# EAGLE board Ground Plate (EAGLE 9.6.2)
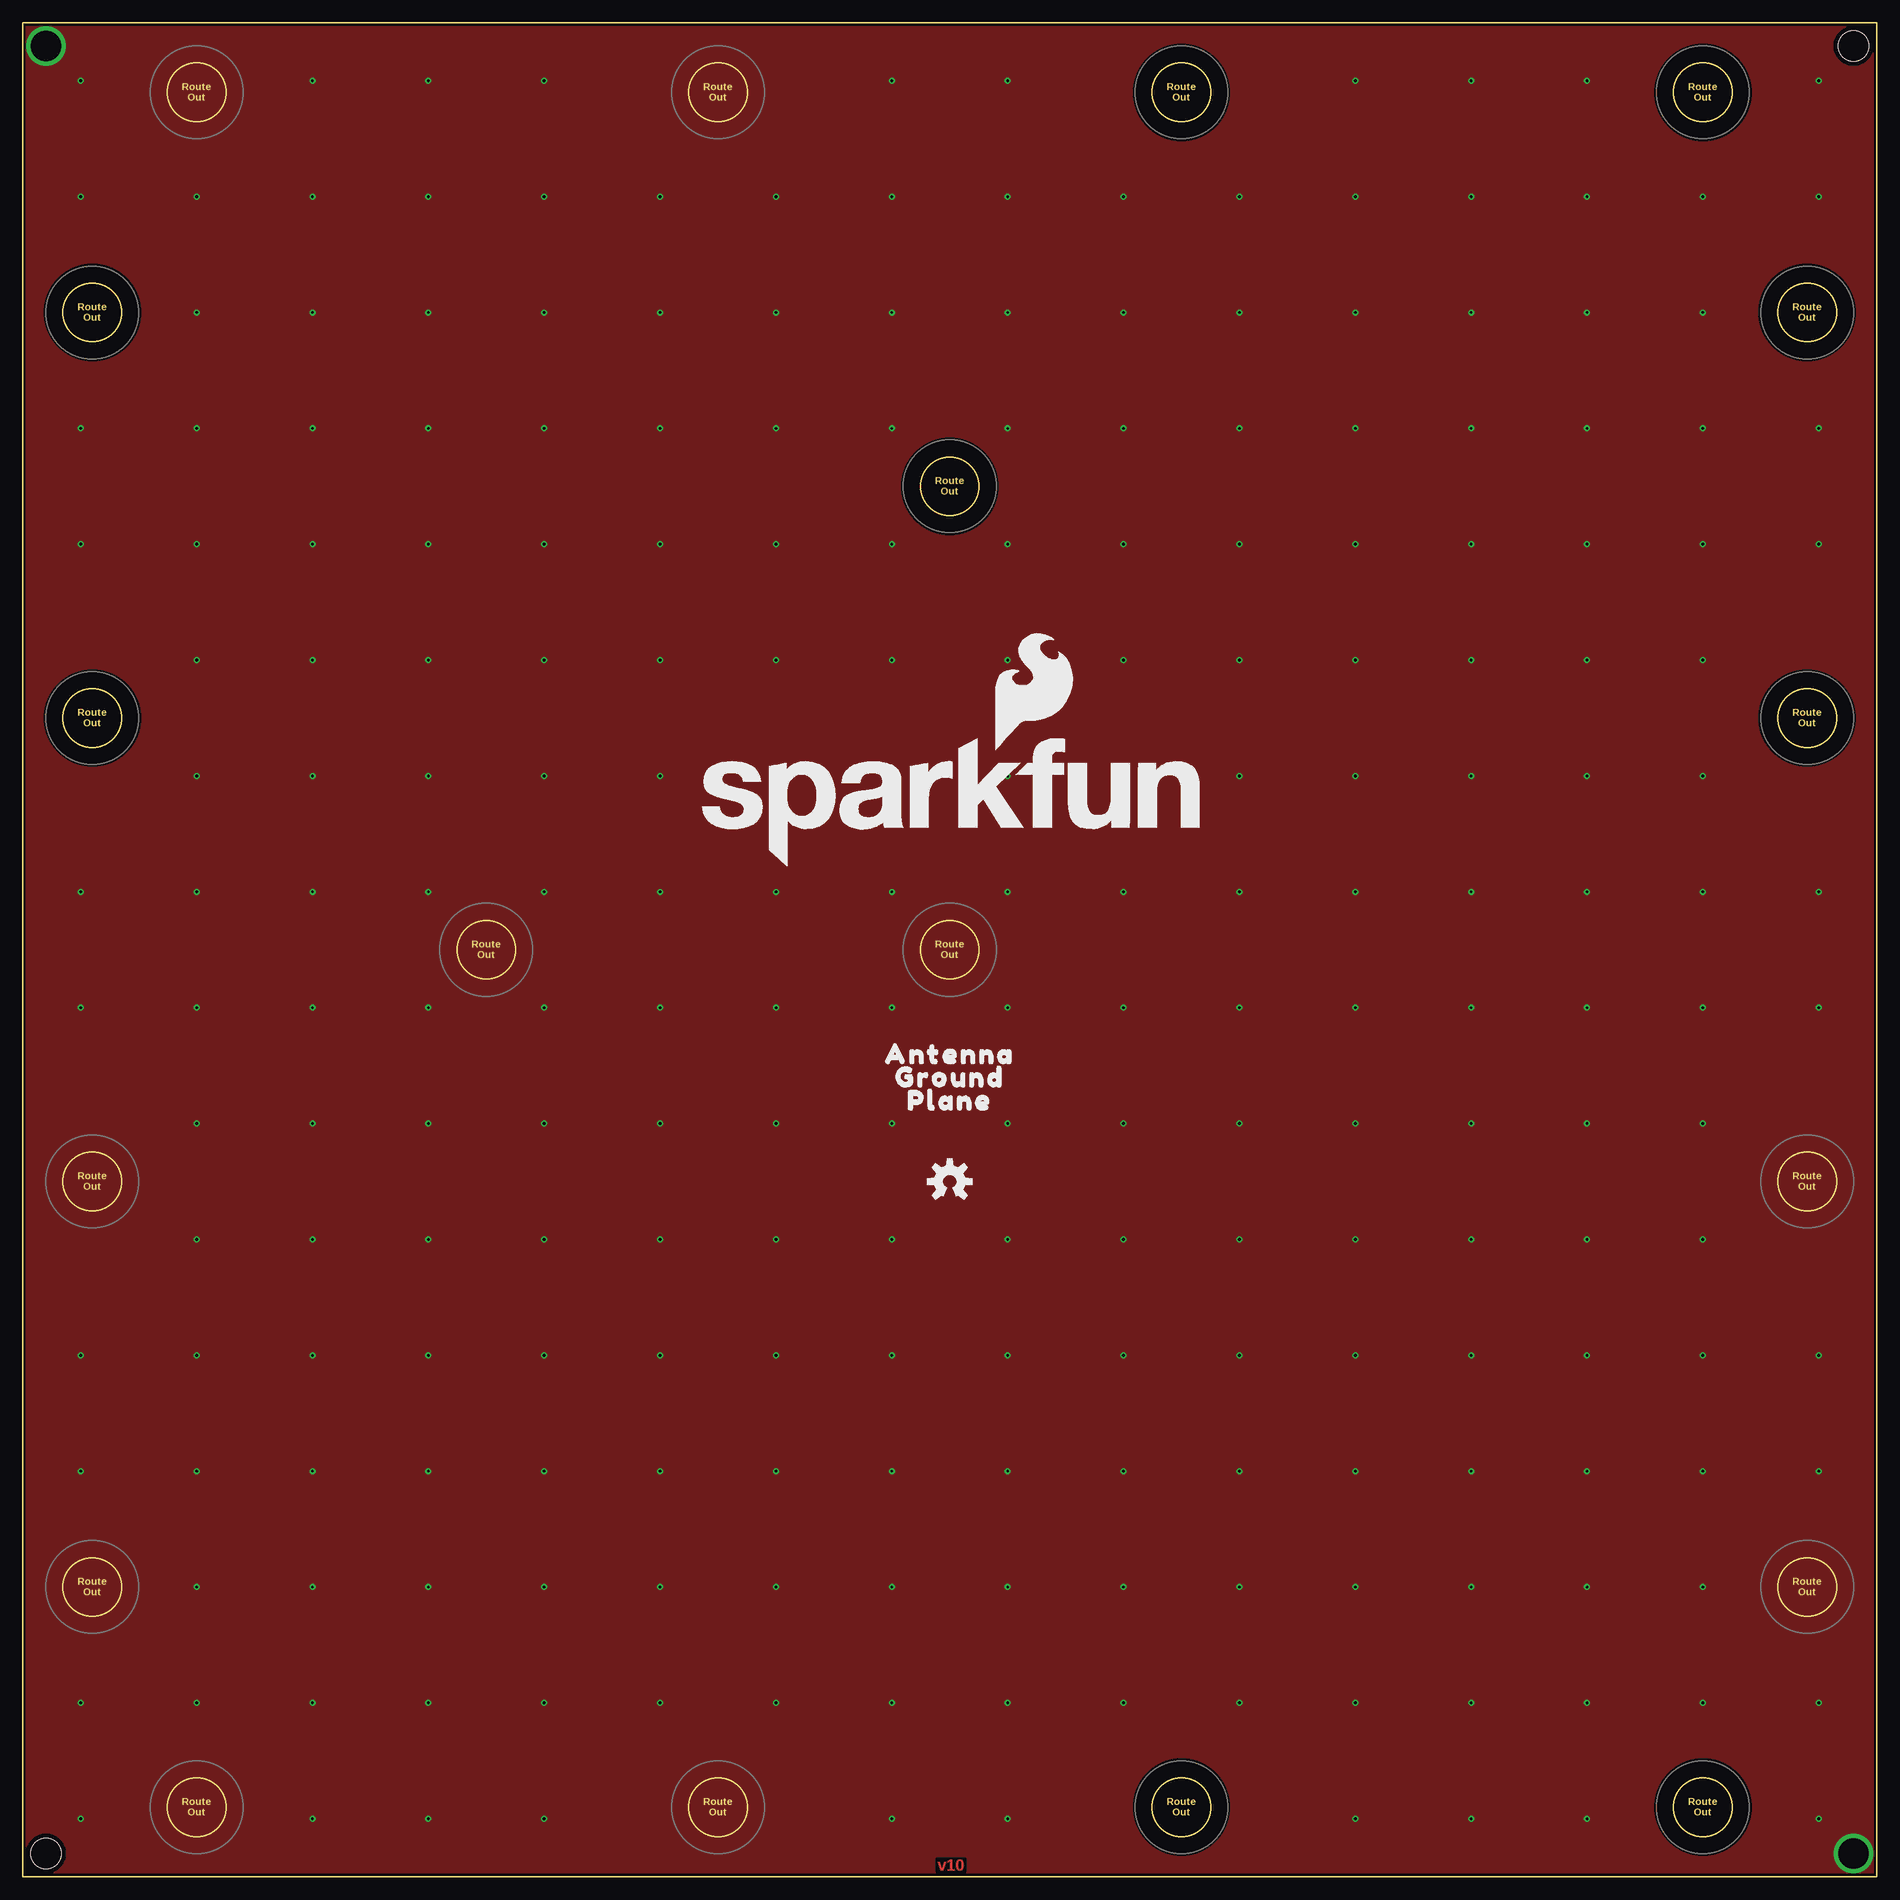
[diagram p0: board, top side]
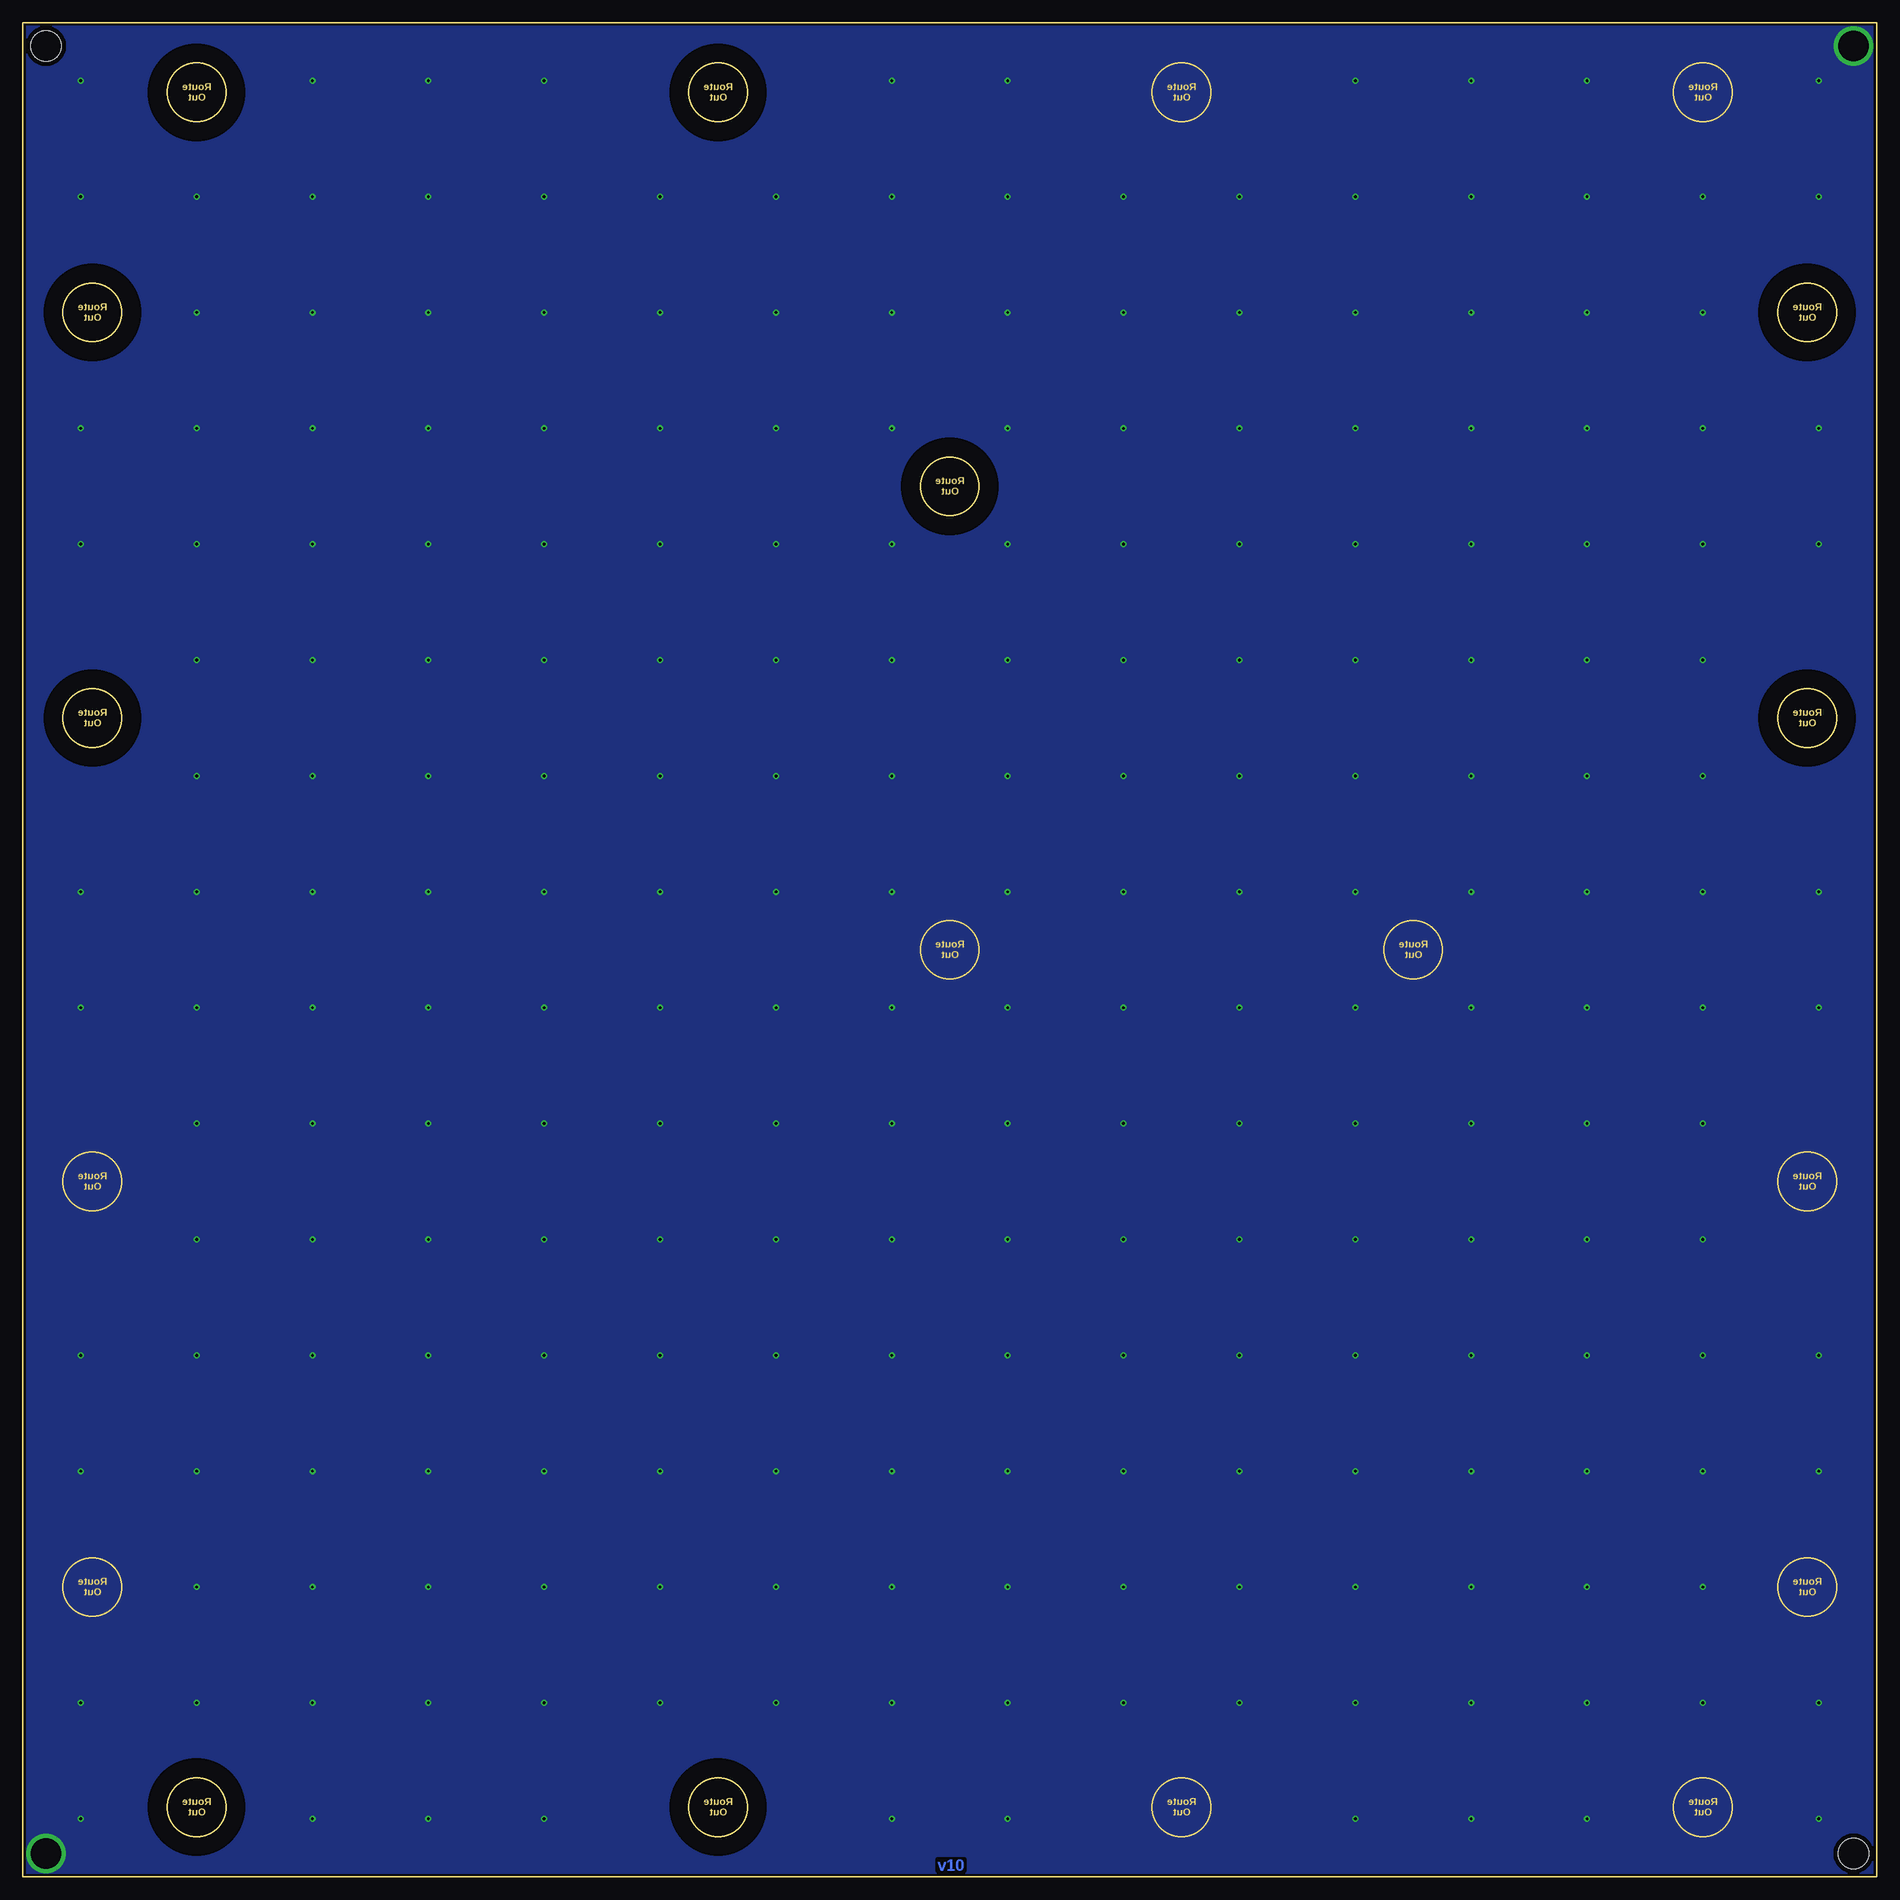
[diagram p1: board, bottom side, seen from below]

Size 203.2 x 203.2 mm. Coordinates in mm from the lower left corner, seen from the top.
Outline: 203.2,0 0,0 0,203.2 203.2,203.2 203.2,0
Copper layers (1*16): Top 0.035mm / dielectric 1.5mm / Bottom 0.035mm
Design rules "SparkFun-2-Layer-General-JLCPCB": minimum track width 7mil, minimum drill 0.3mm, track to track 7mil, track to pad 7mil, pad to pad 7mil, via to via 7mil, smd to smd 7mil, copper to edge 7mil, drill to drill 7mil, minimum pad ring 7mil, minimum via ring 7mil, stop-mask expansion 3mil, vias tented up to drill 25mil, thermal gap 10mil
Net classes: 1 power: width 0.178 mm; 2 3.3V: width 0.508 mm

## Footprints (pad centres in the part's own frame; a part is rotated, then mirrored left to right if it is on the bottom)
STAND-OFF = hole 3.302: 0,0

## Placement (x,y rotation side)
FRAME1  FRAME-LETTER  [CREATIVE_COMMONS]  248.92,8.89 0 top  (outside the outline)
JP31  STAND-OFF  [STAND-OFF]  2.54,2.54 90 top
JP91  STAND-OFF  [STAND-OFF]  200.66,200.66 90 top
LOGO1  OSHW-LOGOM  [OSHW-LOGO-M]  101.6,76.2 0 top
LOGO2  SFE_LOGO_NAME_FLAME.5_INCH  [SFE_LOGO_NAME_FLAME_.5]  73.66,110.49 0 top
U$1  [ANTENNA0]  101.6,90.17 0 top
U$2  SPECIAL_INSTRUCTIONS-ORDERING  [ORDERING_INSTRUCTIONS]  232.41,69.85 0 top  (outside the outline)
U$3  [GROUND1]  101.6,87.63 0 top
U$4  [PLANE2]  101.6,85.09 0 top
U$5  SMA-ANTENNA-THREADED-NOT-KEYED_WITH-STOP  [SMA-THREADED_WITH-STOP]  19.05,7.62 0 top
U$6  SMA-ANTENNA-THREADED-NOT-KEYED_WITH-STOP  [SMA-THREADED_WITH-STOP]  19.05,195.58 0 top
U$7  SMA-ANTENNA-THREADED-NOT-KEYED_WITH-STOP  [SMA-THREADED_WITH-STOP]  76.2,195.58 0 top
U$8  SMA-ANTENNA-THREADED-NOT-KEYED_WITH-STOP  [SMA-THREADED_WITH-STOP]  7.62,76.2 0 top
U$9  SMA-ANTENNA-THREADED-NOT-KEYED_WITH-STOP  [SMA-THREADED_WITH-STOP]  195.58,31.75 0 top
U$10  SMA-ANTENNA-THREADED-NOT-KEYED_WITH-STOP  [SMA-THREADED_WITH-STOP]  195.58,76.2 0 top
U$11  SMA-ANTENNA-THREADED-NOT-KEYED_WITH-STOP  [SMA-THREADED_WITH-STOP]  101.6,101.6 0 top
U$12  SMA-ANTENNA-THREADED-NOT-KEYED_WITH-STOP  [SMA-THREADED_WITH-STOP]  7.62,31.75 0 top
U$13  SMA-ANTENNA-THREADED-NOT-KEYED_NO-COPPER  [SMA-THREADED_NO-COPPER]  7.62,127 0 top
U$14  SMA-ANTENNA-THREADED-NOT-KEYED_NO-COPPER  [SMA-THREADED_NO-COPPER]  7.62,171.45 0 top
U$15  SMA-ANTENNA-THREADED-NOT-KEYED_NO-COPPER  [SMA-THREADED_NO-COPPER]  195.58,127 0 top
U$16  SMA-ANTENNA-THREADED-NOT-KEYED_NO-COPPER  [SMA-THREADED_NO-COPPER]  195.58,171.45 0 top
U$17  SMA-ANTENNA-THREADED-NOT-KEYED_NO-COPPER  [SMA-THREADED_NO-COPPER]  127,7.62 0 top
U$18  SMA-ANTENNA-THREADED-NOT-KEYED_NO-COPPER  [SMA-THREADED_NO-COPPER]  184.15,7.62 0 top
U$19  SMA-ANTENNA-THREADED-NOT-KEYED_NO-COPPER  [SMA-THREADED_NO-COPPER]  127,195.58 0 top
U$20  SMA-ANTENNA-THREADED-NOT-KEYED_NO-COPPER  [SMA-THREADED_NO-COPPER]  184.15,195.58 0 top
U$21  SMA-ANTENNA-THREADED-NOT-KEYED_NO-COPPER  [SMA-THREADED_NO-COPPER]  101.6,152.4 0 top
U$22  SMA-ANTENNA-THREADED-NOT-KEYED_WITH-STOP  [SMA-THREADED_WITH-STOP]  50.8,101.6 0 top
U$54  SMA-ANTENNA-THREADED-NOT-KEYED_WITH-STOP  [SMA-THREADED_WITH-STOP]  76.2,7.62 0 top

## Library data of the parts
FRAME1 LOGO1 LOGO2 U$2 = SparkFun-Aesthetics
JP31 JP91 = SparkFun
U$1 U$3 U$4 = output
U$5-U$22 U$54 = SparkFun-Hardware

## Tracks (layer width: path | path; a pad name or v marks a point on that pad's centre or on a via)
GND  (via drill 0.3, 3.3)
  other vias: 6.35,6.35 31.75,6.35 44.45,6.35 57.15,6.35 95.25,6.35 107.95,6.35 146.05,6.35 158.75,6.35 171.45,6.35 196.85,6.35 6.35,19.05 19.05,19.05 31.75,19.05 44.45,19.05 57.15,19.05 69.85,19.05 82.55,19.05 95.25,19.05 107.95,19.05 120.65,19.05 133.35,19.05 146.05,19.05 158.75,19.05 171.45,19.05 184.15,19.05 196.85,19.05 19.05,31.75 31.75,31.75 44.45,31.75 57.15,31.75 69.85,31.75 82.55,31.75 95.25,31.75 107.95,31.75 120.65,31.75 133.35,31.75 146.05,31.75 158.75,31.75 171.45,31.75 184.15,31.75 6.35,44.45 19.05,44.45 31.75,44.45 44.45,44.45 57.15,44.45 69.85,44.45 82.55,44.45 95.25,44.45 107.95,44.45 120.65,44.45 133.35,44.45 146.05,44.45 158.75,44.45 171.45,44.45 184.15,44.45 196.85,44.45 196.85,57.15 184.15,57.15 171.45,57.15 158.75,57.15 146.05,57.15 133.35,57.15 120.65,57.15 107.95,57.15 95.25,57.15 82.55,57.15 69.85,57.15 57.15,57.15 44.45,57.15 31.75,57.15 19.05,57.15 6.35,57.15 19.05,69.85 19.05,82.55 31.75,69.85 44.45,69.85 57.15,69.85 69.85,69.85 82.55,69.85 95.25,69.85 107.95,69.85 120.65,69.85 133.35,69.85 146.05,69.85 158.75,69.85 171.45,69.85 184.15,69.85 184.15,82.55 184.15,95.25 196.85,95.25 171.45,82.55 158.75,82.55 146.05,82.55 133.35,82.55 120.65,82.55 107.95,82.55 95.25,82.55 82.55,82.55 69.85,82.55 57.15,82.55 44.45,82.55 31.75,82.55 6.35,95.25 19.05,95.25 31.75,95.25 44.45,95.25 57.15,95.25 69.85,95.25 82.55,95.25 95.25,95.25 107.95,95.25 120.65,95.25 133.35,95.25 146.05,95.25 158.75,95.25 171.45,95.25 196.85,107.95 184.15,107.95 171.45,107.95 158.75,107.95 146.05,107.95 133.35,107.95 120.65,107.95 107.95,107.95 95.25,107.95 82.55,107.95 69.85,107.95 57.15,107.95 44.45,107.95 31.75,107.95 19.05,107.95 6.35,107.95 19.05,120.65 19.05,133.35 19.05,146.05 6.35,146.05 31.75,120.65 44.45,120.65 57.15,120.65 69.85,120.65 82.55,120.65 95.25,120.65 107.95,120.65 120.65,120.65 133.35,120.65 146.05,120.65 158.75,120.65 171.45,120.65 184.15,120.65 184.15,133.35 171.45,133.35 158.75,133.35 146.05,133.35 133.35,133.35 120.65,133.35 107.95,133.35 95.25,133.35 82.55,133.35 69.85,133.35 57.15,133.35 44.45,133.35 31.75,133.35 31.75,146.05 44.45,146.05 57.15,146.05 69.85,146.05 82.55,146.05 95.25,146.05 107.95,146.05 120.65,146.05 133.35,146.05 146.05,146.05 158.75,146.05 171.45,146.05 184.15,146.05 196.85,146.05 196.85,158.75 184.15,158.75 171.45,158.75 158.75,158.75 146.05,158.75 133.35,158.75 120.65,158.75 107.95,158.75 95.25,158.75 82.55,158.75 69.85,158.75 57.15,158.75 44.45,158.75 31.75,158.75 19.05,158.75 6.35,158.75 19.05,171.45 31.75,171.45 44.45,171.45 57.15,171.45 69.85,171.45 82.55,171.45 95.25,171.45 107.95,171.45 120.65,171.45 133.35,171.45 146.05,171.45 158.75,171.45 171.45,171.45 184.15,171.45 184.15,184.15 196.85,184.15 171.45,184.15 158.75,184.15 146.05,184.15 133.35,184.15 120.65,184.15 107.95,184.15 95.25,184.15 82.55,184.15 69.85,184.15 57.15,184.15 44.45,184.15 31.75,184.15 19.05,184.15 6.35,184.15 6.35,196.85 31.75,196.85 44.45,196.85 57.15,196.85 95.25,196.85 107.95,196.85 146.05,196.85 158.75,196.85 171.45,196.85 196.85,196.85 200.66,2.54 2.54,200.66
  pour Top (isolate 0.254, rank 4): 0,0 0,203.2 203.2,203.2 203.2,0
  pour Bottom (isolate 0.254, rank 4): 0,0 0,203.2 203.2,203.2 203.2,0

## Text on the board
Top: v10
Bottom: v10
Measures: Measurements in inches
tDocu: Board thickness is 1.6mm